# EAGLE board plusmaze_arduino (EAGLE 7.5.0)
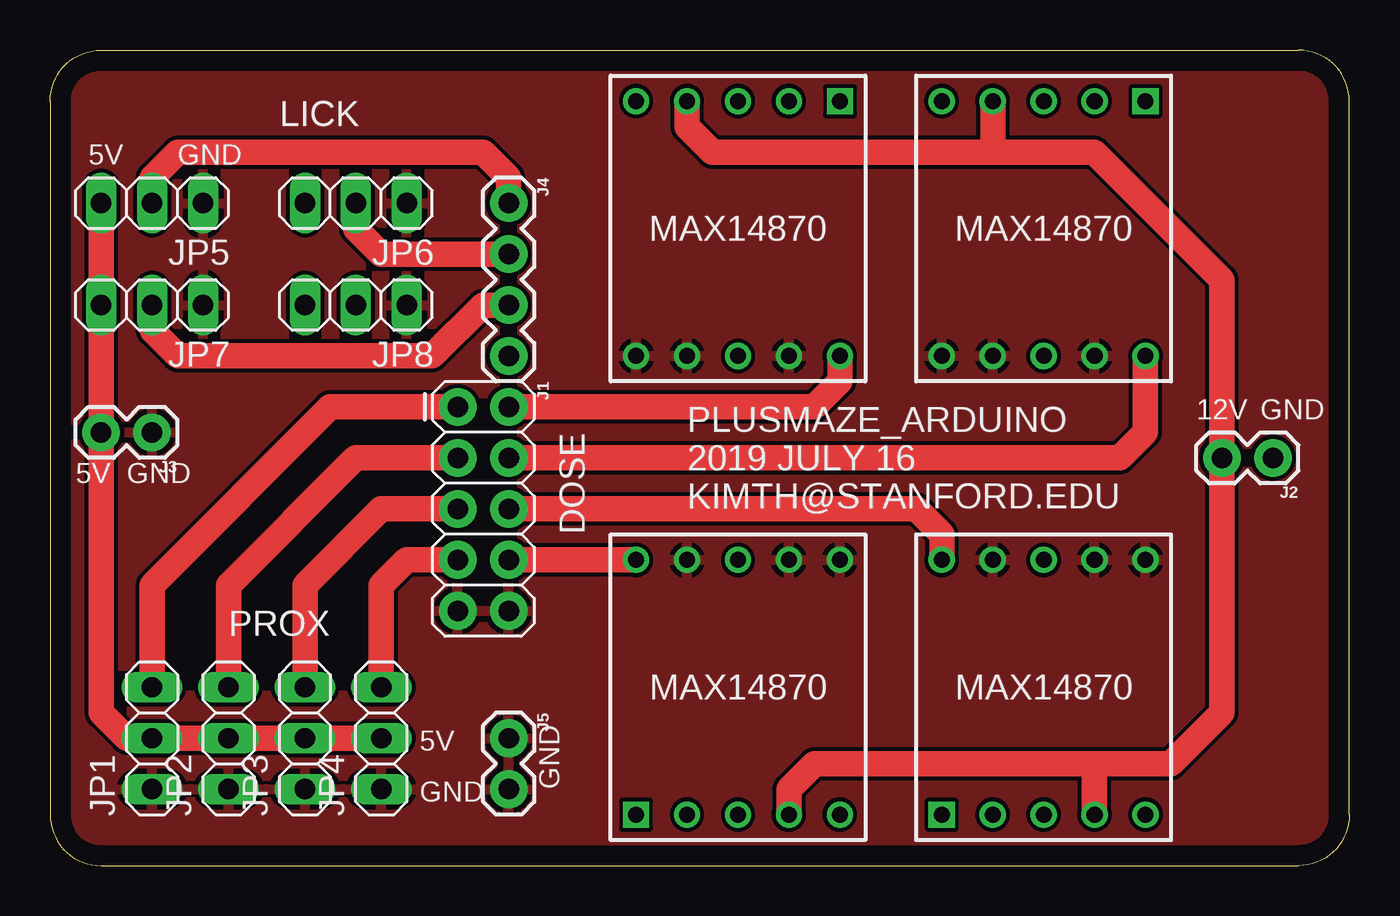
[diagram p0: board, top side]
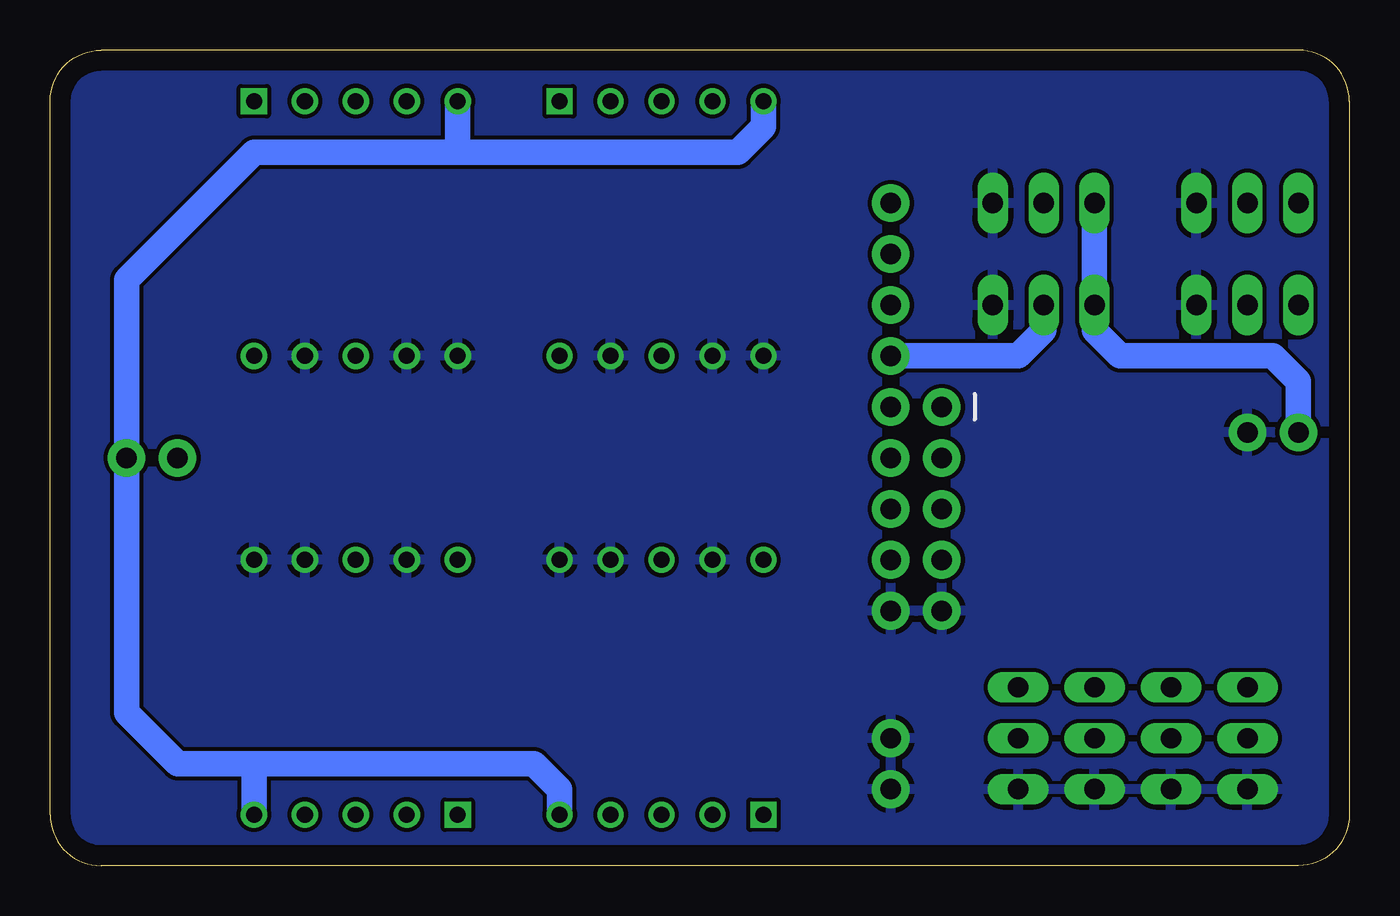
[diagram p1: board, bottom side, seen from below]

Size 64.77 x 40.64 mm. Coordinates in mm from the lower left corner, seen from the top.
Outline: 64.77,2.54 64.77,38.1 arc90 62.23,40.64 2.54,40.64 arc90 0,38.1 0,2.54 arc90 2.54,0 62.23,0 arc90 64.77,2.54
Copper layers (1*16): Top 0.035mm / dielectric 1.5mm / Bottom 0.035mm
Design rules "default": minimum track width 10mil, minimum drill 24mil, track to track 8mil, track to pad 8mil, pad to pad 8mil, via to via 8mil, smd to smd 8mil, copper to edge 40mil, drill to drill 8mil, minimum pad ring 10mil, minimum via ring 8mil, stop-mask expansion 4mil, vias tented up to drill 0mil, thermal gap 10mil

## Footprints (pad centres in the part's own frame; a part is rotated, then mirrored left to right if it is on the bottom)
2X5 = drill 1.016 pad 1.88: 1 0,0; 2 0,2.54; 3 2.54,0; 4 2.54,2.54; 5 5.08,0; 6 5.08,2.54; 7 7.62,0; 8 7.62,2.54; 9 10.16,0; 10 10.16,2.54
1X02 = drill 1.016 pad 1.88: 1 0,0; 2 2.54,0
1X04 = drill 1.016 pad 1.88: 1 0,0; 2 2.54,0; 3 5.08,0; 4 7.62,0
1X03 = drill 1.016 long: 1 -2.54,0; 2 0,0; 3 2.54,0
POLOLU_MAX14870 = drill 0.8 square: P$1 -6.35,5.08 | drill 0.8: P$2 -6.35,2.54; P$3 -6.35,0; P$4 -6.35,-2.54; P$5 -6.35,-5.08; P$6 6.35,-5.08; P$7 6.35,-2.54; P$8 6.35,0; P$9 6.35,2.54; P$10 6.35,5.08

## Placement (x,y rotation side)
J1  [2X5]  20.32,22.86 270 top
J2  [1X02]  60.96,20.32 180 top
J3  [1X02]  5.08,21.59 180 top
J4  [1X04]  22.86,33.02 270 top
J5  [1X02]  22.86,6.35 270 top
JP1  [1X03]  5.08,6.35 90 top
JP2  [1X03]  8.89,6.35 90 top
JP3  [1X03]  12.7,6.35 90 top
JP4  [1X03]  16.51,6.35 90 top
JP5  [1X03]  5.08,33.02 180 top
JP6  [1X03]  15.24,33.02 180 top
JP7  [1X03]  5.08,27.94 180 top
JP8  [1X03]  15.24,27.94 180 top
U$1  POLOLU_MAX14870  [POLOLU_MAX14870]  34.29,31.75 270 top
U$2  POLOLU_MAX14870  [POLOLU_MAX14870]  49.53,31.75 270 top
U$3  POLOLU_MAX14870  [POLOLU_MAX14870]  49.53,8.89 90 top
U$4  POLOLU_MAX14870  [POLOLU_MAX14870]  34.29,8.89 90 top

## Library data of the parts
J1 = SparkFun-Connectors; PROD_ID: CONN-08499; SF_ID: PRT-0778
J2 J3 J5 = SparkFun-Connectors
J4 = SparkFun-Connectors; PROD_ID: CONN-09696
JP1-JP8 = pinhead
U$1-U$4 = kimth

## Nets
5V: J3.2 JP1.2 JP2.2 JP3.2 JP4.2 JP5.3 JP6.3 JP7.3 JP8.3
12V: J2.2 U$1.P$4 U$2.P$4 U$3.P$4 U$4.P$4
AGND: J2.1 U$1.P$5 U$2.P$5 U$3.P$5 U$4.P$5
DGND: J1.9 J1.10 J3.1 J5.1 J5.2 JP1.1 JP2.1 JP3.1 JP4.1 JP5.1 JP6.1 JP7.1 JP8.1 U$1.P$6 U$1.P$7 U$1.P$9 U$2.P$6 U$2.P$7 U$2.P$9 U$3.P$6 U$3.P$7 U$3.P$9 U$4.P$6 U$4.P$7 U$4.P$9
DOSE1: J1.2 U$1.P$10
DOSE2: J1.4 U$2.P$10
DOSE3: J1.6 U$3.P$10
DOSE4: J1.8 U$4.P$10
LICK1: J4.1 JP5.2
LICK2: J4.2 JP6.2
LICK3: J4.3 JP7.2
LICK4: J4.4 JP8.2
PROX1: J1.1 JP1.3
PROX2: J1.3 JP2.3
PROX3: J1.5 JP3.3
PROX4: J1.7 JP4.3

## Tracks (layer width: path | path; a pad name or v marks a point on that pad's centre or on a via)
5V
  Top 1.27: JP4.2 JP3.2 JP2.2 JP1.2 3.81,6.35 2.54,7.62 J3.2 JP7.3 JP5.3
  Bottom 1.27: J3.2 2.54,24.13 3.81,25.4 11.43,25.4 12.7,26.67 JP8.3 JP6.3
12V
  Top 1.27: 52.07,5.08 55.88,5.08 58.42,7.62 J2.2 58.42,29.21 52.07,35.56 46.99,35.56 | 52.07,5.08 38.1,5.08 36.83,3.81 U$4.P$4 | U$3.P$4 52.07,5.08 | 46.99,35.56 33.02,35.56 31.75,36.83 U$1.P$4 | U$2.P$4 46.99,35.56
AGND
  Bottom 1.27: 54.61,5.08 58.42,5.08 60.96,7.62 J2.1 60.96,29.21 54.61,35.56 44.45,35.56 | 54.61,5.08 40.64,5.08 39.37,3.81 U$4.P$5 | U$3.P$5 54.61,5.08 | 44.45,35.56 30.48,35.56 29.21,36.83 U$1.P$5 | U$2.P$5 44.45,35.56
DGND
  pour Top: 0,40.64 64.77,40.64 64.77,0 0,0
  pour Bottom: 0,40.64 64.77,40.64 64.77,0 0,0
DOSE1
  Top 1.27: J1.2 38.1,22.86 39.37,24.13 U$1.P$10
DOSE2
  Top 1.27: J1.4 53.34,20.32 54.61,21.59 U$2.P$10
DOSE3
  Top 1.27: J1.6 43.18,17.78 44.45,16.51 U$3.P$10
DOSE4
  Top 1.27: J1.8 U$4.P$10
LICK1
  Top 1.27: JP5.2 5.08,34.29 6.35,35.56 21.59,35.56 22.86,34.29 J4.1
LICK2
  Top 1.27: JP6.2 15.24,31.75 16.51,30.48 J4.2
LICK3
  Top 1.27: JP7.2 5.08,26.67 6.35,25.4 19.05,25.4 21.59,27.94 J4.3
LICK4
  Bottom 1.27: JP8.2 15.24,26.67 16.51,25.4 J4.4
PROX1
  Top 1.27: J1.1 13.97,22.86 5.08,13.97 JP1.3
PROX2
  Top 1.27: J1.3 15.24,20.32 8.89,13.97 JP2.3
PROX3
  Top 1.27: J1.5 16.51,17.78 12.7,13.97 JP3.3
PROX4
  Top 1.27: J1.7 17.78,15.24 16.51,13.97 JP4.3

## Text on the board
tPlace: LICK | 5V | GND | 12V | GND | 5V | GND | PLUSMAZE_ARDUINO / 2019 JULY 16 / KIMTH@STANFORD.EDU | DOSE | PROX | 5V | GND | GND